# EAGLE board keys (EAGLE 6.5.0)
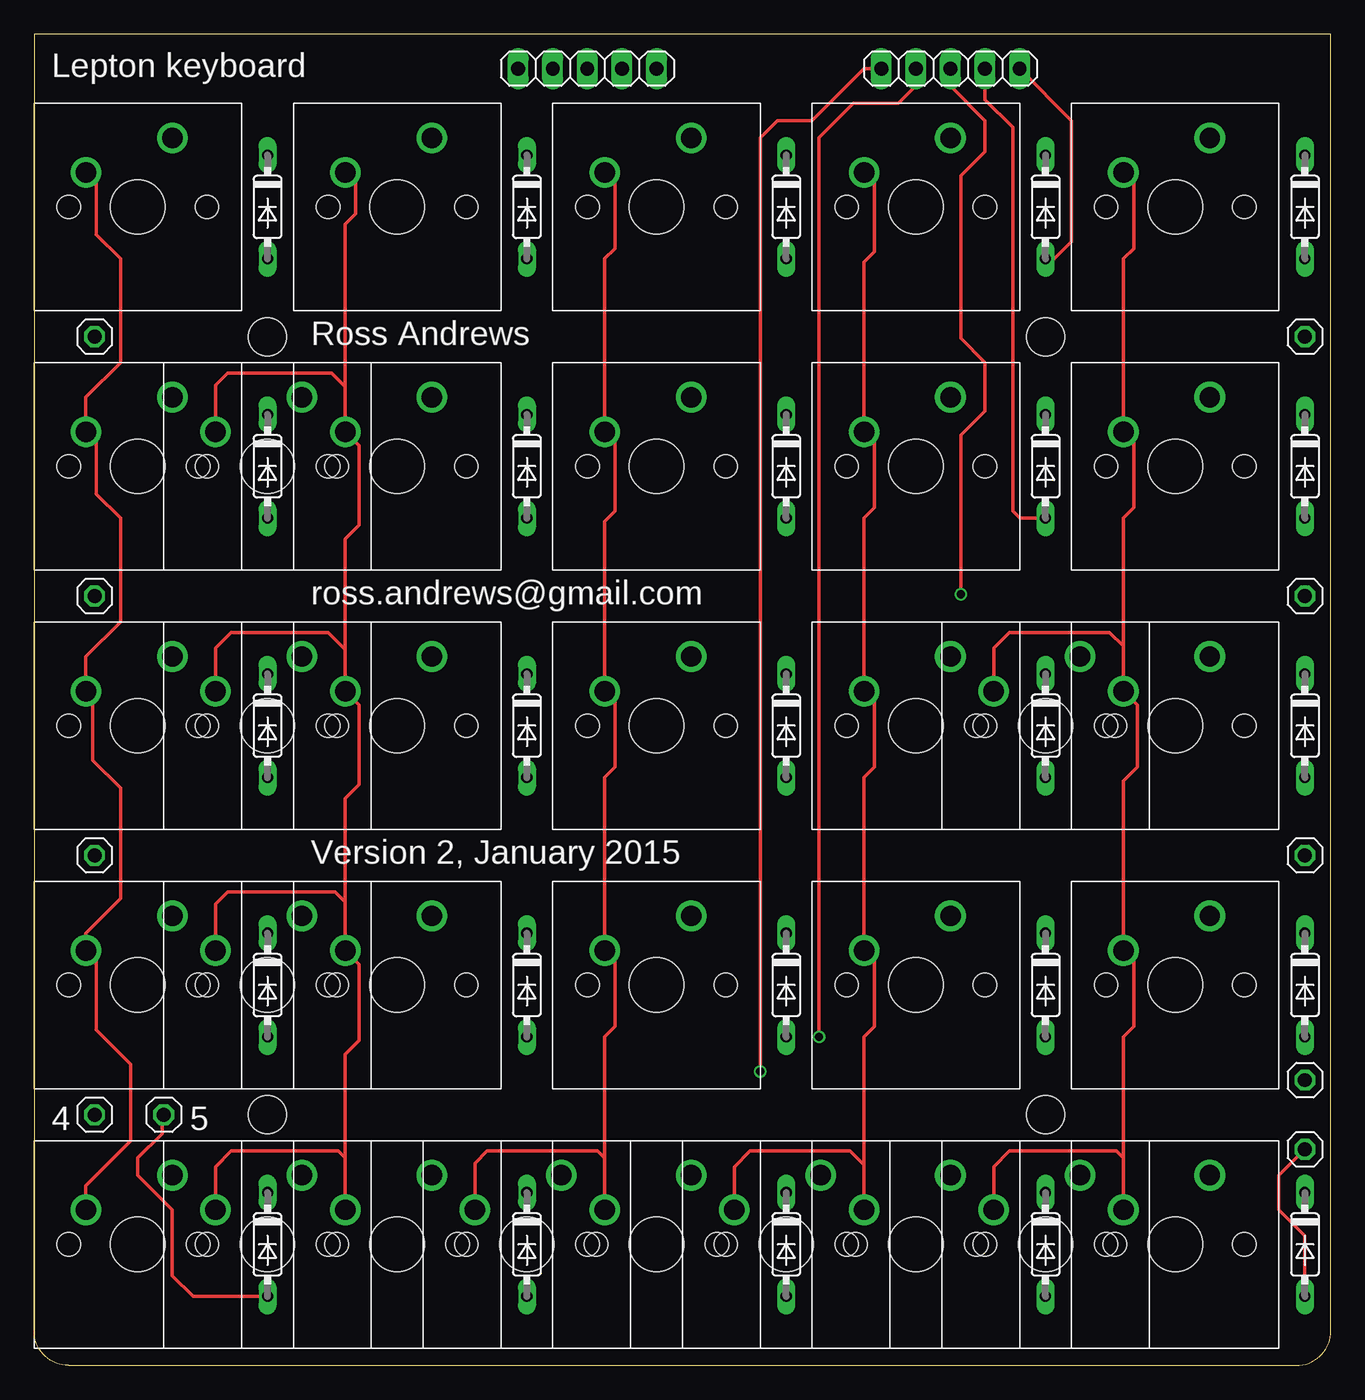
[diagram p0: board, top side]
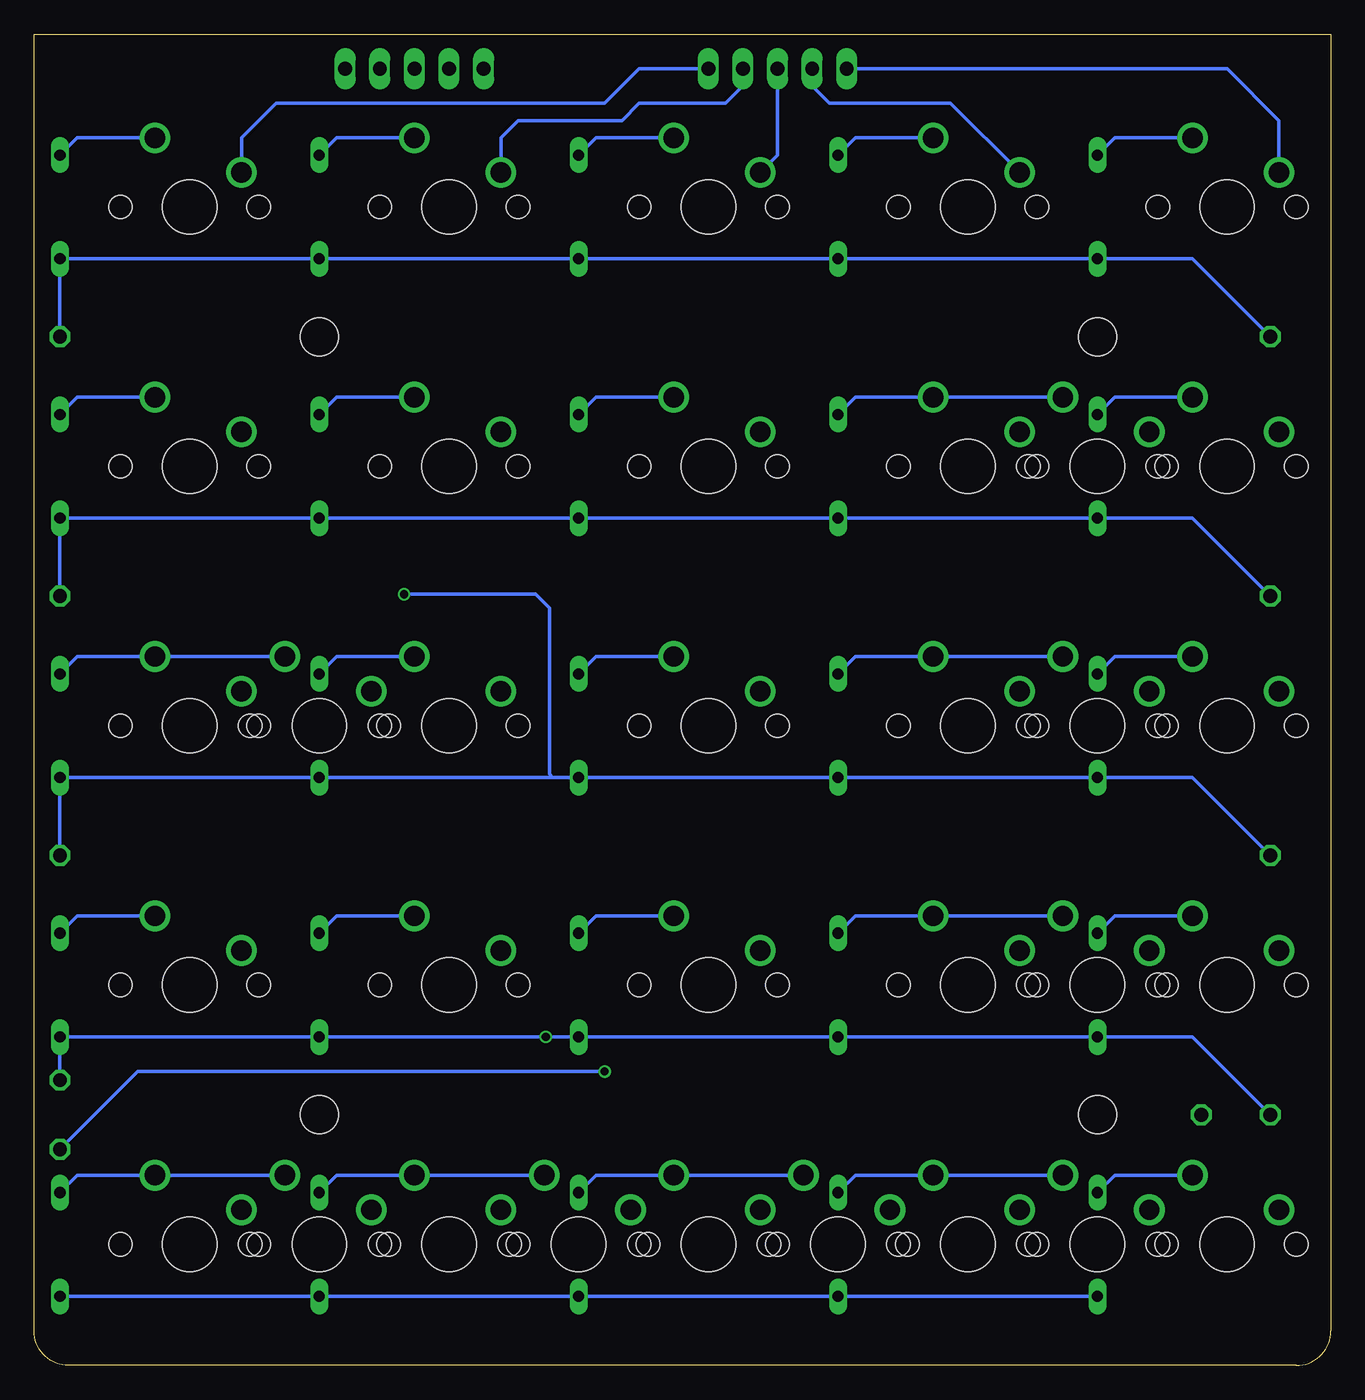
[diagram p1: board, bottom side, seen from below]

Size 95.25 x 97.79 mm. Coordinates in mm from the lower left corner, seen from the top.
Outline: 95.25,2.54 95.25,97.79 0,97.79 0,2.54 arc90 2.54,0 92.71,0 arc90 95.25,2.54
Copper layers (1*16): Top 0.035mm / dielectric 1.5mm / Bottom 0.035mm
Design rules "default": minimum track width 5mil, minimum drill 12mil, track to track 5mil, track to pad 5mil, pad to pad 5mil, via to via 5mil, smd to smd 0mil, copper to edge 10mil, drill to drill 10mil, minimum pad ring 10mil, minimum via ring 6mil, stop-mask expansion 2mil, vias tented up to drill 25mil, thermal gap 10mil
Holes 2.8 mm at 74.3,18.41 74.3,75.56 17.14,75.56 17.14,18.41

## Footprints (pad centres in the part's own frame; a part is rotated, then mirrored left to right if it is on the bottom)
CHERRY-MX-PCB = drill 1.5 pad 2.184: PIN-1 -3.81,2.54; PIN-2 2.54,5.08 | hole 4: 0,0 | hole 1.727: -5.08,0; 5.08,0
DO35-7 = drill 0.813 long: A 3.81,0; C -3.81,0
1X01 = drill 1.016 octagon: 1 0,0
1X05 = drill 1.016 long: 1 -5.08,0; 2 -2.54,0; 3 0,0; 4 2.54,0; 5 5.08,0

## Placement (x,y rotation side)
E$1  [CHERRY-MX-PCB]  7.62,66.04 0 top
E$2  [DO35-7]  17.14,66.04 270 top
E$3  [CHERRY-MX-PCB]  26.67,66.04 0 top
E$4  [DO35-7]  36.2,66.04 270 top
E$5  [CHERRY-MX-PCB]  7.62,85.09 0 top
E$6  [DO35-7]  17.14,85.09 270 top
E$7  [CHERRY-MX-PCB]  45.72,66.04 0 top
E$8  [DO35-7]  55.24,66.04 270 top
E$9  [CHERRY-MX-PCB]  64.77,66.04 0 top
E$10  [DO35-7]  74.3,66.04 270 top
E$11  [1X01]  93.34,75.56 0 top
E$12  [CHERRY-MX-PCB]  83.82,66.04 0 top
E$13  [DO35-7]  93.34,66.04 270 top
E$14  [1X01]  93.34,56.52 0 top
E$15  [CHERRY-MX-PCB]  7.62,46.99 0 top
E$16  [DO35-7]  17.14,46.99 270 top
E$17  [CHERRY-MX-PCB]  26.67,46.99 0 top
E$18  [DO35-7]  36.2,46.99 270 top
E$19  [CHERRY-MX-PCB]  45.72,46.99 0 top
E$20  [CHERRY-MX-PCB]  26.67,85.09 0 top
E$21  [DO35-7]  36.2,85.09 270 top
E$22  [DO35-7]  55.24,46.99 270 top
E$23  [CHERRY-MX-PCB]  64.77,46.99 0 top
E$24  [DO35-7]  74.3,46.99 270 top
E$25  [CHERRY-MX-PCB]  83.82,46.99 0 top
E$26  [DO35-7]  93.34,46.99 270 top
E$27  [1X01]  93.34,37.47 0 top
E$28  [CHERRY-MX-PCB]  7.62,27.94 0 top
E$29  [DO35-7]  17.14,27.94 270 top
E$30  [CHERRY-MX-PCB]  26.67,27.94 0 top
E$31  [DO35-7]  36.2,27.94 270 top
E$32  [CHERRY-MX-PCB]  45.72,27.94 0 top
E$33  [DO35-7]  55.24,27.94 270 top
E$34  [CHERRY-MX-PCB]  64.77,27.94 0 top
E$35  [CHERRY-MX-PCB]  45.72,85.09 0 top
E$36  [DO35-7]  55.24,85.09 270 top
E$37  [DO35-7]  74.3,27.94 270 top
E$38  [CHERRY-MX-PCB]  83.82,27.94 0 top
E$39  [DO35-7]  93.34,27.94 270 top
E$40  [1X01]  93.34,20.95 0 top
E$41  [CHERRY-MX-PCB]  7.62,8.89 0 top
E$42  [DO35-7]  17.14,8.89 270 top
E$43  [CHERRY-MX-PCB]  26.67,8.89 0 top
E$44  [DO35-7]  36.2,8.89 270 top
E$45  [CHERRY-MX-PCB]  45.72,8.89 0 top
E$46  [DO35-7]  55.24,8.89 270 top
E$47  [CHERRY-MX-PCB]  64.77,8.89 0 top
E$48  [DO35-7]  74.3,8.89 270 top
E$49  [CHERRY-MX-PCB]  83.82,8.89 0 top
E$50  [CHERRY-MX-PCB]  64.77,85.09 0 top
E$51  [DO35-7]  74.3,85.09 270 top
E$52  [DO35-7]  93.34,8.89 270 top
E$53  [1X01]  93.34,15.88 0 top
E$54  [1X05]  67.31,95.25 0 top
E$55  [CHERRY-MX-PCB]  74.3,46.99 0 top
E$56  [CHERRY-MX-PCB]  17.14,66.04 0 top
E$57  [CHERRY-MX-PCB]  17.14,46.99 0 top
E$58  [CHERRY-MX-PCB]  17.14,27.94 0 top
E$59  [CHERRY-MX-PCB]  55.24,8.89 0 top
E$60  [CHERRY-MX-PCB]  36.2,8.89 0 top
E$61  [CHERRY-MX-PCB]  74.3,8.89 0 top
E$62  [CHERRY-MX-PCB]  17.14,8.89 0 top
E$65  [CHERRY-MX-PCB]  83.82,85.09 0 top
E$66  [DO35-7]  93.34,85.09 270 top
E$76  [1X05]  40.64,95.25 0 top
ROW1  [1X01]  4.45,75.56 0 top
ROW2  [1X01]  4.45,56.52 0 top
ROW3  [1X01]  4.45,37.47 0 top
ROW4  [1X01]  4.45,18.41 0 top
ROW5  [1X01]  9.53,18.41 0 top

## Library data of the parts
E$1 E$3 E$5 E$7 E$9 E$12 E$15 E$17 E$19 E$20 E$23 E$25 E$28 E$30 E$32 E$34 E$35 E$38 E$41 E$43 E$45 E$47 E$49 E$50 E$55-E$62 E$65 = cherrymx
E$2 E$4 E$6 E$8 E$10 E$13 E$16 E$18 E$21 E$22 E$24 E$26 E$29 E$31 E$33 E$36 E$37 E$39 E$42 E$44 E$46 E$48 E$51 E$52 E$66 = adafruit
E$11 E$14 E$27 E$40 E$53 E$54 E$76 ROW1-ROW5 = pinhead

## Nets
S$1: E$1.PIN-2 E$2.C
S$2: E$3.PIN-2 E$4.C E$56.PIN-2
S$3: E$19.PIN-2 E$22.C
S$4: E$3.PIN-1 E$17.PIN-1 E$20.PIN-1 E$30.PIN-1 E$43.PIN-1 E$56.PIN-1 E$57.PIN-1 E$58.PIN-1 E$62.PIN-1 E$76.2
S$5: E$15.PIN-2 E$16.C
S$6: E$17.PIN-2 E$18.C E$57.PIN-2
S$7: E$16.A E$18.A E$22.A E$24.A E$26.A E$27.1 E$54.3 ROW3.1
S$10: E$30.PIN-2 E$31.C E$58.PIN-2
S$11: E$29.A E$31.A E$33.A E$37.A E$39.A E$40.1 E$54.2 ROW4.1
S$12: E$28.PIN-2 E$29.C
S$13: E$23.PIN-2 E$24.C
S$14: E$25.PIN-2 E$26.C E$55.PIN-2
S$17: E$47.PIN-2 E$48.C E$59.PIN-2
S$18: E$42.A E$44.A E$46.A E$48.A E$52.A E$53.1 E$54.1 ROW5.1
S$19: E$45.PIN-2 E$46.C E$60.PIN-2
S$21: E$5.PIN-2 E$6.C
S$22: E$20.PIN-2 E$21.C
S$23: E$35.PIN-2 E$36.C
S$24: E$6.A E$11.1 E$21.A E$36.A E$51.A E$54.5 E$66.A ROW1.1
S$25: E$50.PIN-2 E$51.C
S$26: E$65.PIN-2 E$66.C
S$27: E$7.PIN-2 E$8.C
S$28: E$9.PIN-2 E$10.C
S$29: E$12.PIN-2 E$13.C
S$30: E$2.A E$4.A E$8.A E$10.A E$13.A E$14.1 E$54.4 ROW2.1
S$31: E$32.PIN-2 E$33.C
S$32: E$34.PIN-2 E$37.C
S$33: E$38.PIN-2 E$39.C
S$34: E$41.PIN-2 E$42.C
S$35: E$43.PIN-2 E$44.C E$62.PIN-2
S$36: E$49.PIN-2 E$52.C E$61.PIN-2
S$37: E$1.PIN-1 E$5.PIN-1 E$15.PIN-1 E$28.PIN-1 E$41.PIN-1 E$76.1
S$38: E$7.PIN-1 E$19.PIN-1 E$32.PIN-1 E$35.PIN-1 E$45.PIN-1 E$60.PIN-1 E$76.3
S$39: E$9.PIN-1 E$23.PIN-1 E$34.PIN-1 E$47.PIN-1 E$50.PIN-1 E$59.PIN-1 E$76.4
S$40: E$12.PIN-1 E$25.PIN-1 E$38.PIN-1 E$49.PIN-1 E$55.PIN-1 E$61.PIN-1 E$65.PIN-1 E$76.5

## Tracks (layer width: path | path; a pad name or v marks a point on that pad's centre or on a via)
S$1
  Bottom 0.254: E$1.PIN-2 15.88,71.12 E$2.C
S$2
  Bottom 0.254: E$4.C 34.92,71.12 E$3.PIN-2 E$56.PIN-2
S$3
  Bottom 0.254: E$19.PIN-2 53.98,52.07 E$22.C
S$4
  Top 0.254: E$56.PIN-1 13.34,72.01 14.22,72.9 21.84,72.9 22.86,71.88 E$3.PIN-1 | E$57.PIN-1 13.34,52.7 14.48,53.85 21.59,53.85 22.86,52.58 E$17.PIN-1 | E$58.PIN-1 13.34,33.91 14.22,34.8 22.1,34.8 22.86,34.04 E$30.PIN-1 | E$43.PIN-1 22.86,15.24 | 22.86,15.24 22.86,22.86 23.88,23.88 23.88,29.46 E$30.PIN-1 | E$30.PIN-1 22.86,41.66 23.88,42.67 23.88,48.51 E$17.PIN-1 | E$17.PIN-1 22.86,60.71 23.88,61.72 23.88,67.56 E$3.PIN-1 | E$3.PIN-1 22.86,83.82 23.62,84.58 23.62,86.87 E$20.PIN-1 | E$62.PIN-1 13.34,14.61 14.48,15.75 22.35,15.75 22.86,15.24
  Bottom 0.254: E$20.PIN-1 27.94,92.71 36.83,92.71 38.1,93.98 E$76.2
S$5
  Bottom 0.254: E$15.PIN-2 15.88,52.07 E$16.C
S$6
  Bottom 0.254: E$57.PIN-2 E$17.PIN-2 34.92,52.07 E$18.C
S$7  (via drill 0.6)
  Top 0.254: v68.07,56.64 68.07,68.33 69.85,70.1 69.85,73.66 68.07,75.44 68.07,87.38 69.85,89.15 69.85,91.44 67.31,93.98 E$54.3
  Bottom 0.254: 57.15,43.18 E$24.A E$26.A E$27.1 | v68.07,56.64 58.42,56.64 57.4,55.63 57.4,43.43 57.15,43.18 | 57.15,43.18 E$22.A E$18.A E$16.A 10.16,43.18 ROW3.1
S$10
  Bottom 0.254: E$58.PIN-2 E$30.PIN-2 34.92,33.02 E$31.C
S$11  (via drill 0.6)
  Top 0.254: v57.66,24.13 57.66,90.17 60.2,92.71 63.5,92.71 64.77,93.98 E$54.2
  Bottom 0.254: ROW4.1 10.16,24.13 E$29.A E$31.A E$33.A v57.66,24.13 E$37.A E$39.A E$40.1
S$12
  Bottom 0.254: E$28.PIN-2 15.88,33.02 E$29.C
S$13
  Bottom 0.254: E$23.PIN-2 73.03,52.07 E$24.C
S$14
  Bottom 0.254: E$55.PIN-2 E$25.PIN-2 92.08,52.07 E$26.C
S$17
  Bottom 0.254: E$59.PIN-2 E$47.PIN-2 73.03,13.97 E$48.C
S$18  (via drill 0.6)
  Top 0.254: v53.34,21.59 53.34,90.17 54.61,91.44 57.15,91.44 60.96,95.25 E$54.1 | E$52.A 93.34,9.53 91.44,11.43 91.44,13.97 E$53.1 | E$42.A 11.68,5.08 10.16,6.6 10.16,11.43 7.62,13.97 7.62,15.24 9.4,17.02 9.4,18.29 ROW5.1
  Bottom 0.254: E$52.A E$48.A E$46.A E$44.A E$42.A | v53.34,21.59 87.63,21.59 E$53.1
S$19
  Bottom 0.254: E$46.C 53.98,13.97 E$45.PIN-2 E$60.PIN-2
S$21
  Bottom 0.254: E$5.PIN-2 15.88,90.17 E$6.C
S$22
  Bottom 0.254: E$20.PIN-2 34.92,90.17 E$21.C
S$23
  Bottom 0.254: E$35.PIN-2 53.98,90.17 E$36.C
S$24
  Top 0.254: E$51.A 74.93,81.28 76.2,82.55 76.2,91.44 E$54.5
  Bottom 0.254: ROW1.1 10.16,81.28 E$6.A E$21.A E$36.A E$51.A E$66.A E$11.1
S$25
  Bottom 0.254: E$50.PIN-2 73.03,90.17 E$51.C
S$26
  Bottom 0.254: E$65.PIN-2 92.08,90.17 E$66.C
S$27
  Bottom 0.254: E$7.PIN-2 53.98,71.12 E$8.C
S$28
  Bottom 0.254: E$9.PIN-2 73.03,71.12 E$10.C
S$29
  Bottom 0.254: E$12.PIN-2 92.08,71.12 E$13.C
S$30
  Top 0.254: E$10.A 72.39,62.23 71.88,62.74 71.88,90.93 69.85,92.96 E$54.4
  Bottom 0.254: ROW2.1 10.16,62.23 E$2.A E$4.A E$8.A E$10.A E$13.A E$14.1
S$31
  Bottom 0.254: E$32.PIN-2 53.98,33.02 E$33.C
S$32
  Bottom 0.254: E$34.PIN-2 73.03,33.02 E$37.C
S$33
  Bottom 0.254: E$38.PIN-2 92.08,33.02 E$39.C
S$34
  Bottom 0.254: E$41.PIN-2 15.88,13.97 E$42.C
S$35
  Bottom 0.254: E$44.C 34.92,13.97 E$43.PIN-2 E$62.PIN-2
S$36
  Bottom 0.254: E$52.C 92.08,13.97 E$49.PIN-2 E$61.PIN-2
S$37
  Top 0.254: E$41.PIN-1 3.81,13.21 7.11,16.51 7.11,22.1 4.57,24.64 4.57,29.72 E$28.PIN-1 3.81,31.75 6.35,34.29 6.35,42.42 4.32,44.45 4.32,49.02 E$15.PIN-1 3.81,52.07 6.35,54.61 6.35,62.23 4.57,64.01 4.57,67.82 E$1.PIN-1 3.81,71.12 6.35,73.66 6.35,81.28 4.57,83.06 4.57,86.87 E$5.PIN-1
  Bottom 0.254: E$76.1 7.62,95.25 3.81,91.44 E$5.PIN-1
S$38
  Top 0.254: E$35.PIN-1 42.67,86.87 42.67,82.04 41.91,81.28 E$7.PIN-1 42.67,67.82 42.67,62.74 41.91,61.98 E$19.PIN-1 42.67,48.77 42.67,43.94 41.91,43.18 E$32.PIN-1 42.67,29.72 42.67,24.89 41.91,24.13 41.91,15.24 | E$45.PIN-1 41.91,15.24 | E$60.PIN-1 32.38,14.86 33.27,15.75 41.4,15.75 41.91,15.24
  Bottom 0.254: E$76.3 40.64,88.9 E$35.PIN-1
S$39
  Top 0.254: E$59.PIN-1 51.44,14.61 52.58,15.75 59.94,15.75 60.96,14.73 E$47.PIN-1 60.96,24.13 61.72,24.89 61.72,29.72 E$34.PIN-1 60.96,43.18 61.72,43.94 61.72,48.77 E$23.PIN-1 60.96,62.23 61.72,62.99 61.72,67.82 E$9.PIN-1 60.96,81.03 61.72,81.79 61.72,86.87 E$50.PIN-1
  Bottom 0.254: E$50.PIN-1 60.96,90.17 59.69,91.44 52.07,91.44 50.8,92.71 44.45,92.71 43.18,93.98 E$76.4
S$40
  Top 0.254: E$55.PIN-1 70.48,52.7 71.63,53.85 78.99,53.85 80.01,52.83 E$25.PIN-1 | E$65.PIN-1 80.77,86.87 80.77,82.04 80.01,81.28 E$12.PIN-1 80.77,67.82 80.77,62.99 80.01,62.23 E$25.PIN-1 | E$25.PIN-1 81.03,48.51 81.03,43.94 80.01,42.93 E$38.PIN-1 80.77,29.72 80.77,24.89 80.01,24.13 80.01,15.24 | E$49.PIN-1 80.01,15.24 | E$61.PIN-1 70.48,14.61 71.63,15.75 79.5,15.75 80.01,15.24
  Bottom 0.254: E$65.PIN-1 80.01,90.17 77.47,92.71 53.34,92.71 50.8,95.25 E$76.5

## Text on the board
tNames: Lepton keyboard | Ross Andrews | ross.andrews@gmail.com | Version 2, January 2015 | 4 | 5